# Altium PCB IO-testing-mezzanine.PcbDoc
Units mm, origin at the board's own origin, x right, y up, seen from the top; angles counter-clockwise.
Board outline 85 x 54 mm, 2 copper layers (Top Layer, Bottom Layer), stack 1.071 mm thick; 29 components, 88 nets, 312 pads, 154 vias.
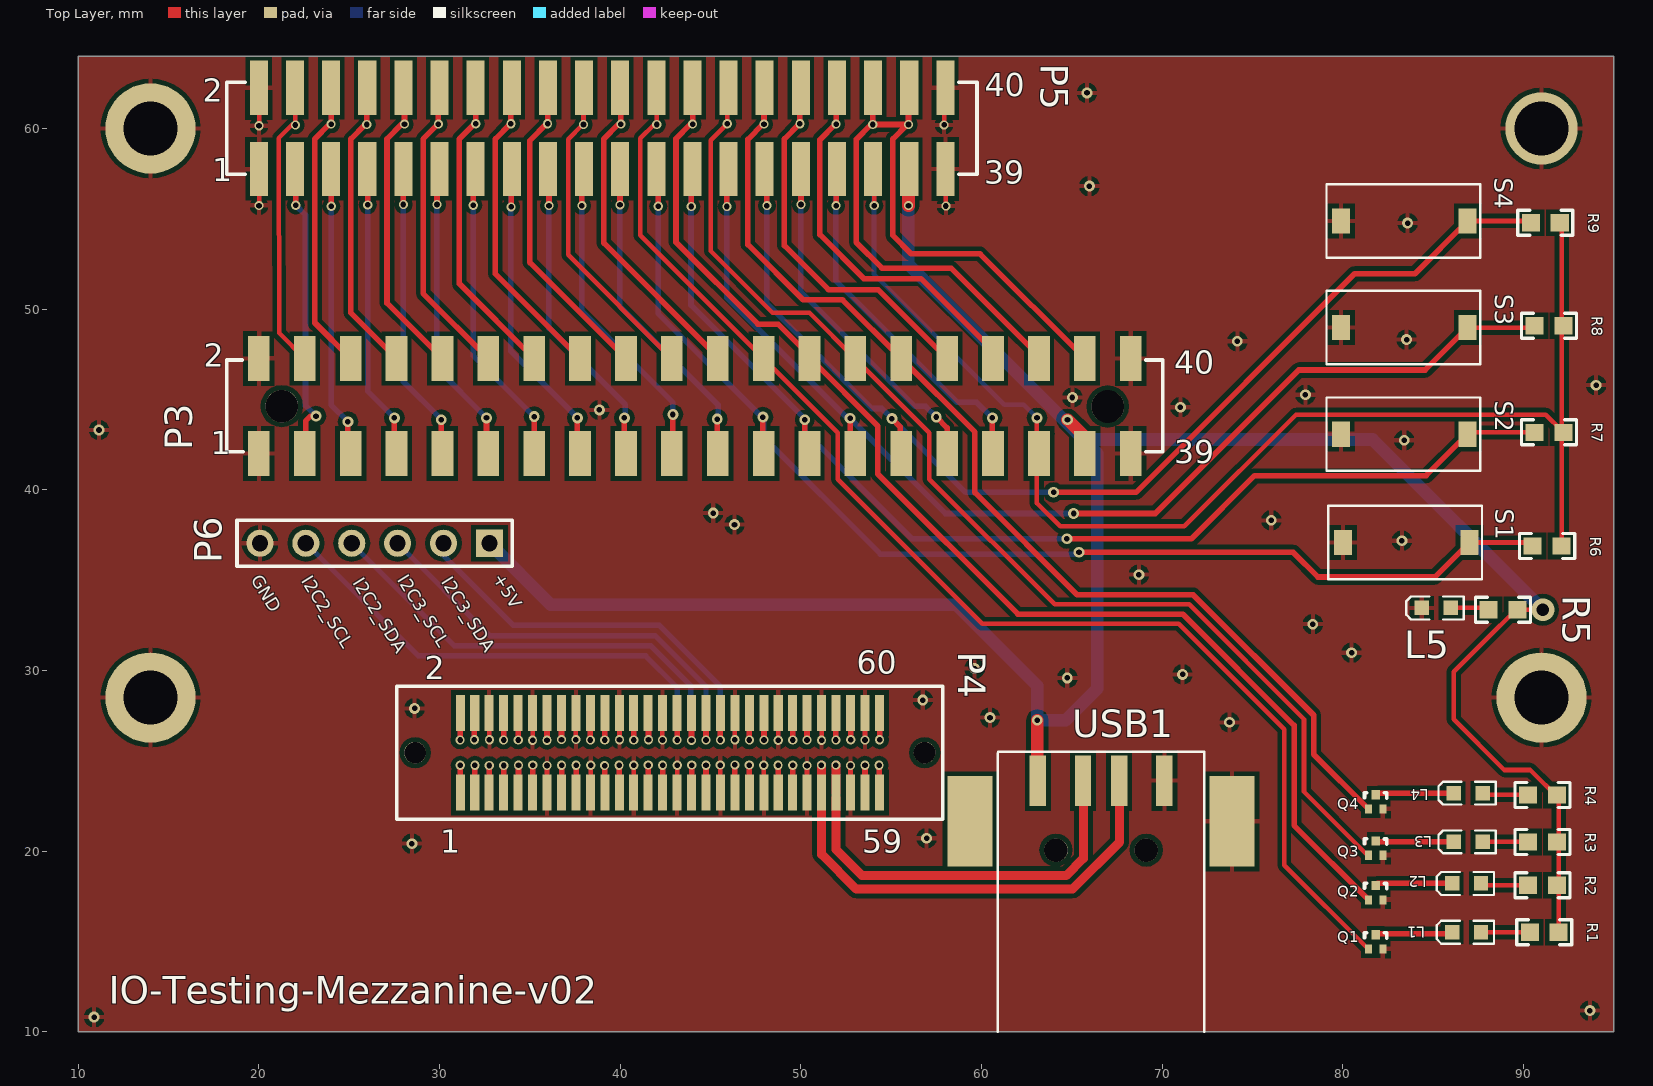
[diagram p0: Top Layer view]
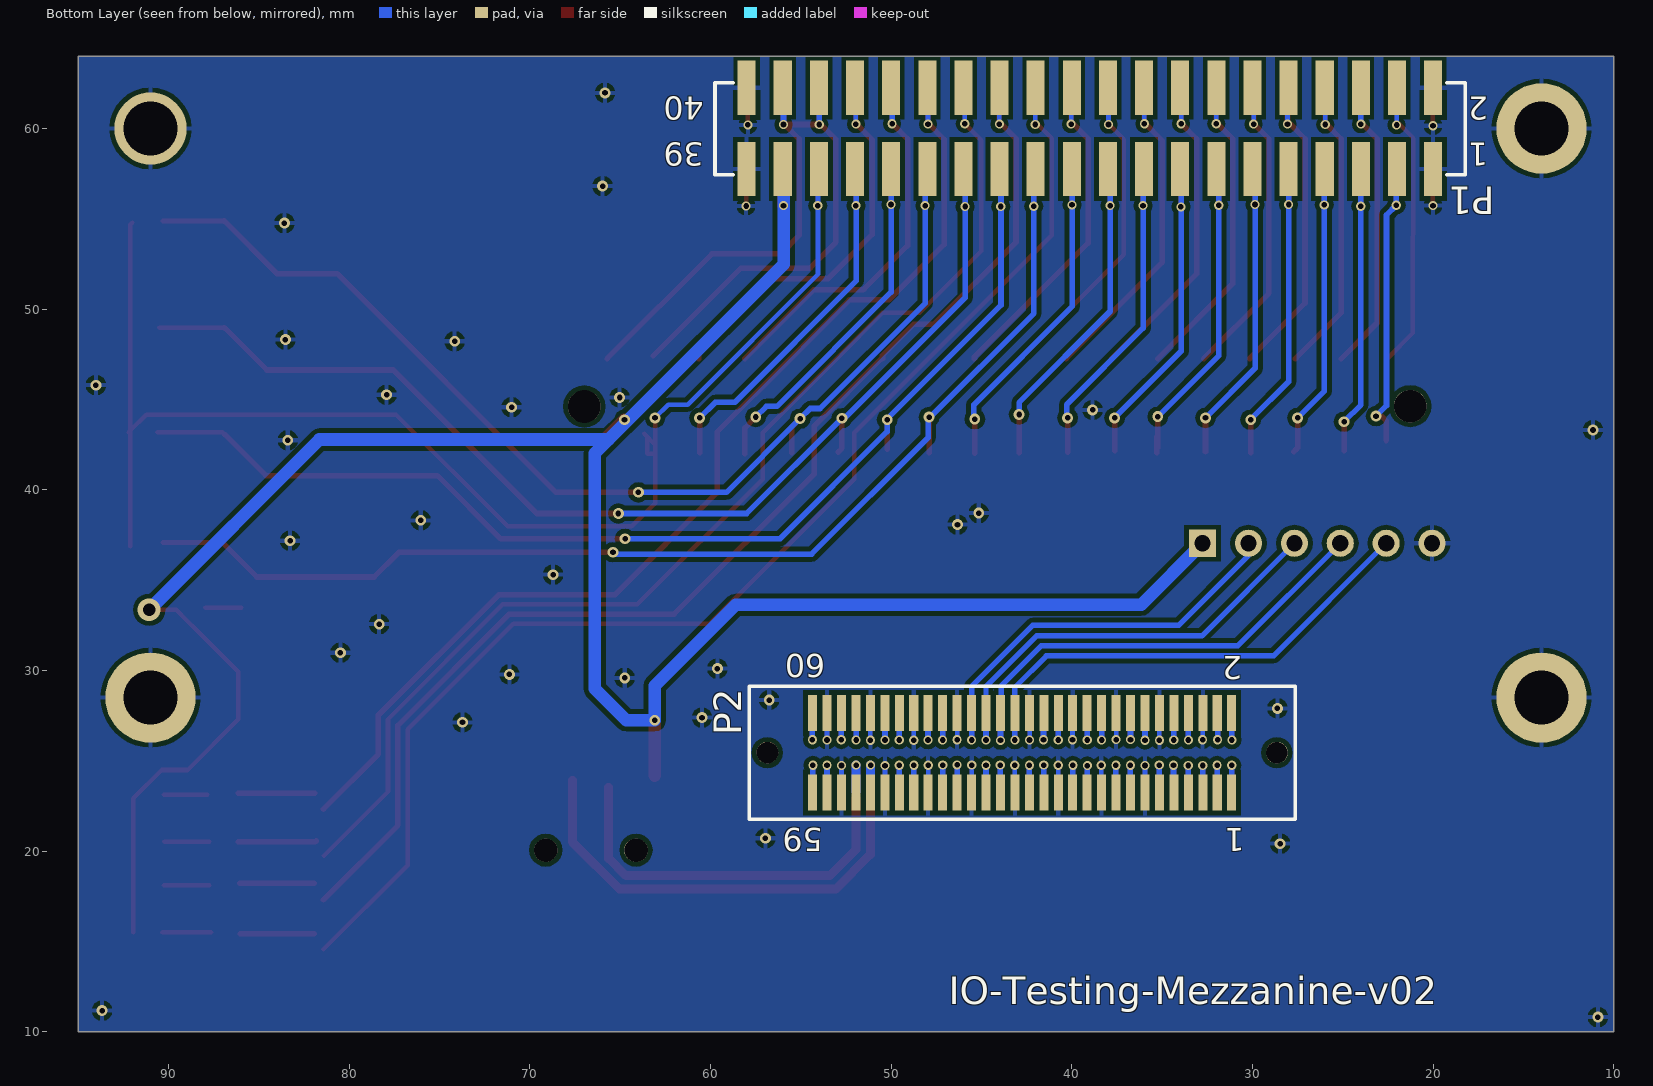
[diagram p1: Bottom Layer view, seen from below]
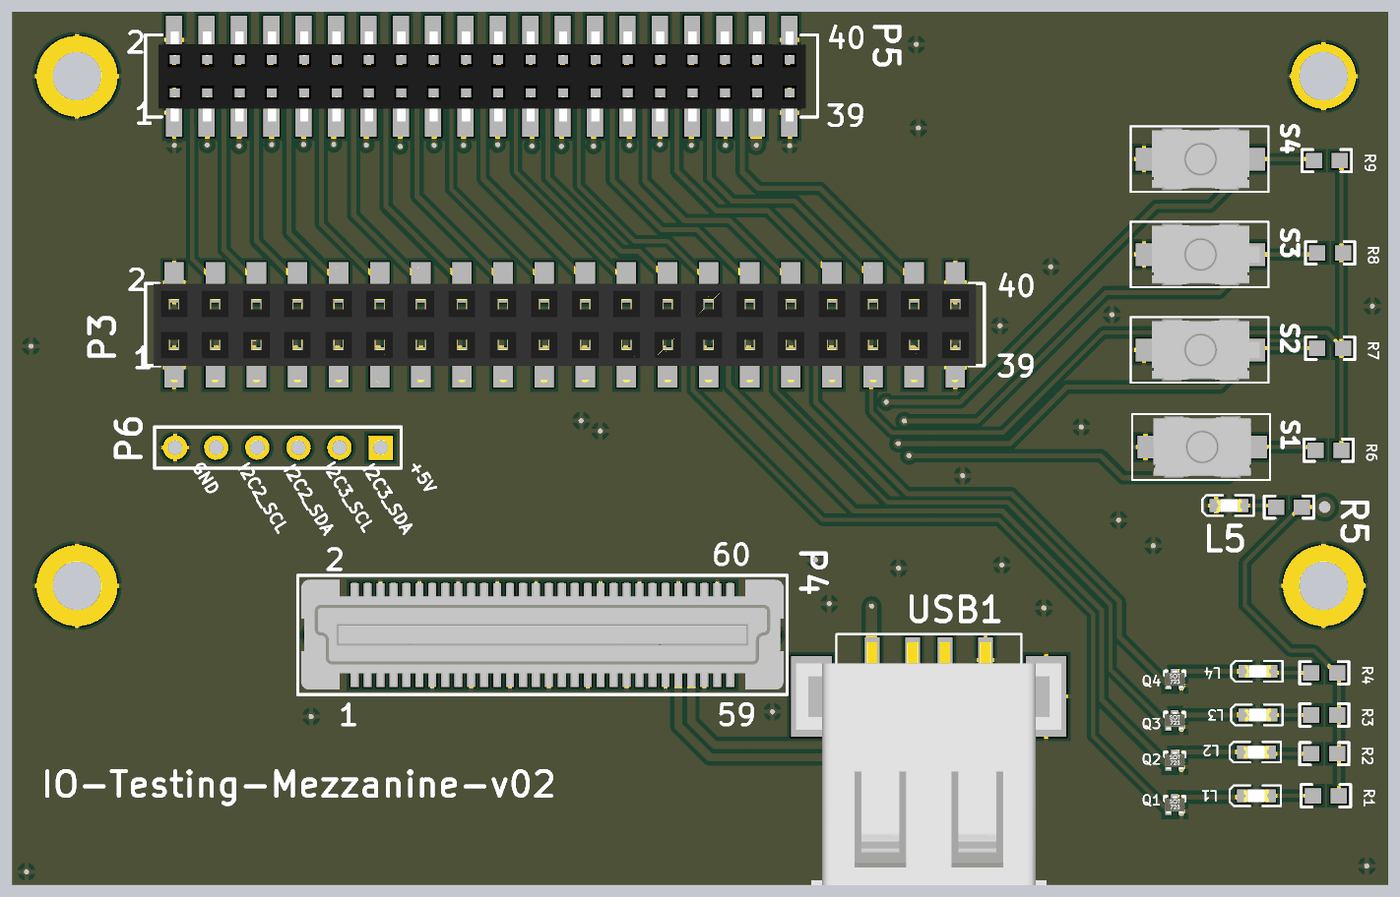
[diagram p2: 3D render of the assembled board from above, using the file's embedded part models]

## Layer stack, top to bottom
Top Solder: solder mask 0.0102, Solder Resist, Dk 3.5
Top Layer: signal copper 0.0356
Dielectric 1: dielectric 1, FR-4, Dk 4.8
Bottom Layer: signal copper 0.0356
Bottom Solder: solder mask 0.0102, Solder Resist, Dk 3.5

## Board outline
10,10 95,10 95,64 10,64

## Design rules (kind name [scope] priority, off if disabled: settings)
Clearance Clearance_1 [All] p1: gap=0.254
Clearance Clearance_USB [InNet('USB_D+') vs InNet('USB_D-')] p2: gap=0.3 except(0.254: Text-Text)
HoleSize [All] p1: absolutevalues=TRUE maxlimit=4 minlimit=0.31 maxpercent=80.000 minpercent=20.000
MinimumSolderMaskSliver [All] p1: minsoldermaskwidth=0.08
PolygonConnect [All] p1: connectstyle=Relief reliefconductorwidth=0.254 reliefentries=4 polygonreliefangle="90 Angle" airgapwidth=0.254
RoomDefinition "keepout _through_hole_HDMI" [InComponentClass('Bottom Side Components')] p1: confinementstyle=ConfineOut formatcopy=TRUE lockcomponents=FALSE outline 26,21 44,21 44,10 26,10
RoomDefinition "keepout _through_hole_USB" [InComponentClass('Bottom Side Components')] p2: confinementstyle=ConfineOut formatcopy=TRUE lockcomponents=FALSE outline 58,25.7 95,25.7 95,10 58,10
RoomDefinition "keepout _through_hole_PWR" [InComponentClass('Bottom Side Components')] p3: confinementstyle=ConfineOut formatcopy=TRUE lockcomponents=FALSE outline 77.5,64 88.7,64 88.7,50.2 77.5,50.2
RoutingVias [All] p1: holewidth=0.31 width=0.6 viastyle="Through Hole" minholewidth=0.31 minwidth=0.5 maxholewidth=0.711 maxwidth=1.27
SilkToSilkClearance [All] p1: silktosilkclearance=0.1
SilkToSolderMaskClearance [IsPad] p1: minsilkscreentomaskgap=0.1 clearancetoexposedcopper=TRUE
SolderMaskExpansion [All] p1: expansion=0.1
Width USB [InNet('USB_D+')   or InNet('USB_D-')] p1: maxlimit=0.5 minlimit=0.5 preferedwidth=0.5
Width [All] p2: maxlimit=0.7 minlimit=0.254 preferedwidth=0.31
26 further rules are at their usual default settings.

## Components (designator, comment, footprint, x,y, rotation, side; value= is the part's Value field where it differs from the comment)
L1 "" LED_0603 86.85,15.51 r180 top
L2 "" LED_0603 86.85,18.21 r180 top
L3 "" LED_0603 86.95,20.51 r180 top
L4 "" LED_0603 86.95,23.21 r180 top
L5 "" LED_0603 85.17,33.46 r180 top
P1 "low-speed_connector" low-speed_connector_SM 20,61 r0 bottom
P2 "High-speed_connector" high-speed_connector 42.75,25.45 r0 bottom
P3 "Female_Header_20x2_SM" Female_Header_20x2_SM 20,43.5 r0 top
P4 "High-speed_connector_top" high-speed_connector_top 42.75,25.45 r0 top
P5 "Female_Header_20x2_SM" low-speed_connector_SM_top 20,59 r0 top
P6 "Header 6" HDR1X6 32.76,37.04 r180 top (schematic designator P4)
Q1 "RUM002N05T2L" SOT-723 81.82,14.97 r0 top
Q2 "RUM002N05T2L" SOT-723 81.82,17.705 r0 top
Q3 "RUM002N05T2L" SOT-723 81.82,20.17 r0 top
Q4 "RUM002N05T2L" SOT-723 81.82,22.72 r0 top
R1 "Res1" 0603 91.15,15.51 r0 top
R2 "Res1" 0603 91.05,18.11 r0 top
R3 "Res1" 0603 91.05,20.502 r0 top
R4 "Res1" 0603 91.05,23.11 r0 top
R5 "Res1" 0603 88.87,33.36 r0 top
R6 "Res1" 0603 91.31,36.88 r0 top
R7 "Res1" 0603 91.41,43.18 r0 top
R8 "Res1" 0603 91.41,49.08 r0 top
R9 "Res1" 0603 91.21,54.78 r0 top
S1 "SW-PB" SW-PB 83.51,37.08 r0 top
S2 "SW-PB" SW-PB 83.41,43.08 r0 top
S3 "SW-PB" SW-PB 83.41,48.98 r0 top
S4 "SW-PB" SW-PB 83.41,54.88 r0 top
USB1 "USB" USB_a 66.62,23.9 r0 top

## Footprints (in the part's own frame and the unit in brackets; to place one, negate y for a bottom-side part, rotate by r counter-clockwise, add the part's x,y. Pads: shape width x height; smd on the part's side, far side on the other; paste and mask are expansions set on the pad)
0603 [mm]
  rect 1x0.95 smd: 1(-0.8,0) 2(0.8,0)
  silkscreen extent -1.52,-0.69 1.52,0.69, body extent -0.87,-0.47 0.87,0.47, height 0.85
Female_Header_20x2_SM [mm] "Surface mount Female header / 2.54mm pitch"
  rect 1.2x2.5 smd: 1(0,-1.5) 2(0,3.76) 3(2.54,-1.5) 4(2.54,3.76) 5(5.08,-1.5) 6(5.08,3.76) 7(7.62,-1.5) 8(7.62,3.76) 9(10.16,-1.5) 10(10.16,3.76) 11(12.7,-1.5) 12(12.7,3.76) 13(15.24,-1.5) 14(15.24,3.76) 15(17.78,-1.5) 16(17.78,3.76) 17(20.32,-1.5) 18(20.32,3.76) 19(22.86,-1.5) 20(22.86,3.76) 21(25.4,-1.5) 22(25.4,3.76) 23(27.94,-1.5) 24(27.94,3.76) 25(30.48,-1.5) 26(30.48,3.76) 27(33.02,-1.5) 28(33.02,3.76) 29(35.56,-1.5) 30(35.56,3.76) 31(38.1,-1.5) 32(38.1,3.76) 33(40.64,-1.5) 34(40.64,3.76) 35(43.18,-1.5) 36(43.18,3.76) 37(45.72,-1.5) 38(45.72,3.76) 39(48.26,-1.5) 40(48.26,3.76)
  round 1.8 hole 1.8 unplated: ""(1.27,1.13) ""(46.99,1.11)
  silkscreen extent -1.78,-1.4 50.04,3.68, body extent -1.27,-2.46 49.53,4.74, height 3.55
HDR1X6 [mm] "Connector; Header; 6 Position"
  rect 1.5x1.5 hole 0.9: 1(0,0)
  round 1.5 hole 0.9: 2(2.54,0) 3(5.08,0) 4(7.62,0) 5(10.16,0) 6(12.7,0)
  silkscreen extent -1.27,-1.27 13.97,1.27
high-speed_connector [mm] "high-speed connector"
  rect 0.5x2 smd: 1(-11.6,2.2) 2(-11.6,-2.2) 3(-10.8,2.2) 4(-10.8,-2.2) 5(-10,2.2) 6(-10,-2.2) 7(-9.2,2.2) 8(-9.2,-2.2) 9(-8.4,2.2) 10(-8.4,-2.2) 11(-7.6,2.2) 12(-7.6,-2.2) 13(-6.8,2.2) 14(-6.8,-2.2) 15(-6,2.2) 16(-6,-2.2) 17(-5.2,2.2) 18(-5.2,-2.2) 19(-4.4,2.2) 20(-4.4,-2.2) 21(-3.6,2.2) 22(-3.6,-2.2) 23(-2.8,2.2) 24(-2.8,-2.2) 25(-2,2.2) 26(-2,-2.2) 27(-1.2,2.2) 28(-1.2,-2.2) 29(-0.4,2.2) 30(-0.4,-2.2) 31(0.4,2.2) 32(0.4,-2.2) 33(1.2,2.2) 34(1.2,-2.2) 35(2,2.2) 36(2,-2.2) 37(2.8,2.2) 38(2.8,-2.2) 39(3.6,2.2) 40(3.6,-2.2) 41(4.4,2.2) 42(4.4,-2.2) 43(5.2,2.2) 44(5.2,-2.2) 45(6,2.2) 46(6,-2.2) 47(6.8,2.2) 48(6.8,-2.2) 49(7.6,2.2) 50(7.6,-2.2) 51(8.4,2.2) 52(8.4,-2.2) 53(9.2,2.2) 54(9.2,-2.2) 55(10,2.2) 56(10,-2.2) 57(10.8,2.2) 58(10.8,-2.2) 59(11.6,2.2) 60(11.6,-2.2)
  round 0.8 hole 0.8 unplated: ""(-14.1,0)
  round 1.2 hole 1.2 unplated: ""(14.1,0)
  silkscreen extent -15.11,-3.68 15.11,3.68, body extent -14.9,-3 14.9,3, height 7.65
high-speed_connector_top [mm] "high-speed connector"
  rect 0.5x2 smd: 1(-11.6,-2.2) 2(-11.6,2.2) 3(-10.8,-2.2) 4(-10.8,2.2) 5(-10,-2.2) 6(-10,2.2) 7(-9.2,-2.2) 8(-9.2,2.2) 9(-8.4,-2.2) 10(-8.4,2.2) 11(-7.6,-2.2) 12(-7.6,2.2) 13(-6.8,-2.2) 14(-6.8,2.2) 15(-6,-2.2) 16(-6,2.2) 17(-5.2,-2.2) 18(-5.2,2.2) 19(-4.4,-2.2) 20(-4.4,2.2) 21(-3.6,-2.2) 22(-3.6,2.2) 23(-2.8,-2.2) 24(-2.8,2.2) 25(-2,-2.2) 26(-2,2.2) 27(-1.2,-2.2) 28(-1.2,2.2) 29(-0.4,-2.2) 30(-0.4,2.2) 31(0.4,-2.2) 32(0.4,2.2) 33(1.2,-2.2) 34(1.2,2.2) 35(2,-2.2) 36(2,2.2) 37(2.8,-2.2) 38(2.8,2.2) 39(3.6,-2.2) 40(3.6,2.2) 41(4.4,-2.2) 42(4.4,2.2) 43(5.2,-2.2) 44(5.2,2.2) 45(6,-2.2) 46(6,2.2) 47(6.8,-2.2) 48(6.8,2.2) 49(7.6,-2.2) 50(7.6,2.2) 51(8.4,-2.2) 52(8.4,2.2) 53(9.2,-2.2) 54(9.2,2.2) 55(10,-2.2) 56(10,2.2) 57(10.8,-2.2) 58(10.8,2.2) 59(11.6,-2.2) 60(11.6,2.2)
  round 1.2 hole 1.2 unplated: ""(-14.1,0)
  round 0.8 hole 0.8 unplated: ""(14.1,0)
  silkscreen extent -15.11,-3.68 15.11,3.68, body extent -14.9,-3.38 14.9,3.42, height 7.65
LED_0603 [mm] "Chip LED, 2-Leads, Body 1.6x0.8mm, IPC Medium Density"
  rect 0.8x0.8 smd: 1(-0.8,0) 2(0.8,0)
  silkscreen extent -1.52,-0.64 1.65,0.64, body extent -0.8,-0.4 0.8,0.4, height 0.7
low-speed_connector_SM [mm] "Surface mount low-speed connector / 2mm pitch"
  rect 1x3 smd: 1(0,3.25) 2(0,-1.25) 3(2,3.25) 4(2,-1.25) 5(4,3.25) 6(4,-1.25) 7(6,3.25) 8(6,-1.25) 9(8,3.25) 10(8,-1.25) 11(10,3.25) 12(10,-1.25) 13(12,3.25) 14(12,-1.25) 15(14,3.25) 16(14,-1.25) 17(16,3.25) 18(16,-1.25) 19(18,3.25) 20(18,-1.25) 21(20,3.25) 22(20,-1.25) 23(22,3.25) 24(22,-1.25) 25(24,3.25) 26(24,-1.25) 27(26,3.25) 28(26,-1.25) 29(28,3.25) 30(28,-1.25) 31(30,3.25) 32(30,-1.25) 33(32,3.25) 34(32,-1.25) 35(34,3.25) 36(34,-1.25) 37(36,3.25) 38(36,-1.25) 39(38,3.25) 40(38,-1.25)
  silkscreen extent -1.78,-1.52 39.75,3.56, body extent -1.65,-2.29 39.62,4.3, height 6
low-speed_connector_SM_top [mm] "Surface mount low-speed connector / 2mm pitch"
  rect 1x3 smd: 1(0,-1.25) 2(0,3.25) 3(2,-1.25) 4(2,3.25) 5(4,-1.25) 6(4,3.25) 7(6,-1.25) 8(6,3.25) 9(8,-1.25) 10(8,3.25) 11(10,-1.25) 12(10,3.25) 13(12,-1.25) 14(12,3.25) 15(14,-1.25) 16(14,3.25) 17(16,-1.25) 18(16,3.25) 19(18,-1.25) 20(18,3.25) 21(20,-1.25) 22(20,3.25) 23(22,-1.25) 24(22,3.25) 25(24,-1.25) 26(24,3.25) 27(26,-1.25) 28(26,3.25) 29(28,-1.25) 30(28,3.25) 31(30,-1.25) 32(30,3.25) 33(32,-1.25) 34(32,3.25) 35(34,-1.25) 36(34,3.25) 37(36,-1.25) 38(36,3.25) 39(38,-1.25) 40(38,3.25)
  silkscreen extent -1.78,-1.52 39.75,3.56, body extent -0.97,-1.79 39.03,3.77, height 4.5
SOT-723 [mm]
  rect 0.37x0.5 smd mask+0.05: 1(-0.4,-0.4) 2(0.4,-0.4)
  rect 0.47x0.5 smd mask+0.05: 3(0,0.4)
  silkscreen extent -0.62,0.22 0.61,0.51, body extent -0.63,-0.54 0.63,0.51, height 0.45
SW-PB [mm] "Chip LED, 2-Leads, Body 1.6x0.8mm, IPC Medium Density"
  rect 1x1.4 smd: 1(-3.5,0) 2(3.5,0)
  silkscreen extent -4.32,-2.03 4.19,2.03, body extent -3.65,-1.92 3.65,1.92, height 2.35
USB_a [mm] "Mini USB"
  round 1.3 hole 1.3: 0(-2.5,-3.85) 0(2.5,-3.85)
  rect 0.9x2.8 smd: 1(-3.5,0) 2(-1,0) 3(1,0) 4(3.5,0)
  rect 2.5x5 smd: 6(7.25,-2.25) 7(-7.25,-2.25)
  silkscreen extent -5.71,-13.9 5.72,1.6, body extent -8.2,-13.91 8.2,1.09, height 7.8

## Part data
L1 L2 L3 L4 L5: library part LTST-C193TBKT-5A, "LED BLUE CLEAR 0603 SMD"
P6: "Header, 6-Pin"
Q1 Q2 Q3 Q4: "Nch 50V 200mA MOSFET"
R1 R2 R3 R4 R5 R6 R7 R8 R9: "Resistor"
S1 S2 S3 S4: "Switch"

## Free pads (board coordinates)
  round 5 hole 3: ""(14,28.5) ""(14,60) ""(91,28.5)
  round 4 hole 3: ""(91,60)

## Via types
v1: diameter 0.508, hole 0.31, Top Layer to Bottom Layer, tented both sides, 100 vias
v2: diameter 0.6, hole 0.31, Top Layer to Bottom Layer, tented both sides, 53 vias
v3: diameter 1.27, hole 0.711, Top Layer to Bottom Layer, tented both sides, 1 vias

## Nets (pads, with @x,y where several pads share a name; then routed paths per layer and width w, separated by ;. In a path a pad name is that pad's centre, name@x,y a point inside that pad or via, vN(x,y) a via of type N, cw(c..) or ccw(c..) an arc to the next point about the centre after c; other vN are vias at no path point)
+1V8: P1.35 P3.35 P5.35 R6.2 R7.2 R8.2 R9.2 | length 76.7
  Top Layer w0.254: v1(54.06,55.73) P5.35@54.06,57.69 ; P3.35@63.07,42.502 P3.35@63.669,43.101 ; v2(63.07,43.98) 63.07,39.26 64.359,37.971 71.221,37.971 77.411,44.161 91.229,44.161 R7.2@92.11,43.28 ; P3.35 63.5,42 P3.35@63.5,42.932 ; R9.2 92.11,54.68 R7.2@92.11,43.28 ; R6.2 R7.2@92.11,43.28 ; R7.2 R7.2@92.11,43.28
  Bottom Layer w0.254: P1.35@54.05,56.93 54.05,51.92 61.26,44.71 62.34,44.71 v2(63.07,43.98)
+5V: P1.37 P3.37 P5.37 P6.1 R1.2 R2.2 R3.2 R4.2 R5.2 USB1.1 | length 133
  Top Layer w0.254: R5.2 v3(91.07,33.36) 89.58,33.36 88.951,32.731 88.951,32.727 88.728,32.504 88.724,32.504 86.14,29.92 86.14,27.289 88.939,24.49 90.384,24.49 91.95,22.924 R1.2
  Top Layer w0.7: v1(55.96,55.73) P5.37@55.96,57.71 ; USB1.1@63.09,24.18 v2(63.09,27.24) ; v2(64.76,43.88) P3.37@65.72,42.92
  Bottom Layer w0.7: P6.1 36.17,33.63 58.61,33.63 63.09,29.15 v2(63.09,27.24) 64.66,27.24 66.404,28.984 66.404,42.026 65.65,42.78 ; P1.37@55.95,56.93 55.95,52.48 65.65,42.78 ; v3(91.07,33.36) 81.65,42.78 65.65,42.78
CLK0/CSI0_MCLK: P2.15 P4.15 | length 3
  Top Layer w0.31: P4.15@36.76,23.26 v1(36.76,24.75)
  Bottom Layer w0.31: P2.15@36.76,23.26 v1(36.76,24.75)
CLK1/CSI1_MCLK: P2.17 P4.17 | length 3
  Top Layer w0.31: P4.17@37.56,23.26 v1(37.56,24.75)
  Bottom Layer w0.31: P2.17@37.56,23.26 v1(37.56,24.75)
CSI0_C+: P2.2 P4.2 | length 3
  Top Layer w0.31: v1(31.14,26.15) P4.2@31.14,27.64
  Bottom Layer w0.31: v1(31.14,26.15) P2.2@31.14,27.64
CSI0_C-: P2.4 P4.4 | length 2.9
  Top Layer w0.31: v1(31.93,26.16) P4.4@31.93,27.63
  Bottom Layer w0.31: v1(31.93,26.16) P2.4@31.93,27.63
CSI0_D0+: P2.8 P4.8 | length 3
  Top Layer w0.31: v1(33.55,26.15) P4.8
  Bottom Layer w0.31: v1(33.55,26.15) P2.8
CSI0_D0-: P2.10 P4.10 | length 3
  Top Layer w0.31: v1(34.36,26.15) P4.10@34.36,27.64
  Bottom Layer w0.31: v1(34.36,26.15) P2.10@34.36,27.64
CSI0_D1+: P2.14 P4.14 | length 3
  Top Layer w0.31: v1(35.95,26.14) P4.14
  Bottom Layer w0.31: v1(35.95,26.14) P2.14
CSI0_D1-: P2.16 P4.16 | length 3
  Top Layer w0.31: v1(36.75,26.17) P4.16
  Bottom Layer w0.31: v1(36.75,26.17) P2.16
CSI0_D2+: P2.20 P4.20 | length 3
  Top Layer w0.31: v1(38.35,26.15) P4.20
  Bottom Layer w0.31: v1(38.35,26.15) P2.20
CSI0_D2-: P2.22 P4.22 | length 3
  Top Layer w0.31: v1(39.15,26.15) P4.22
  Bottom Layer w0.31: v1(39.15,26.15) P2.22
CSI0_D3+: P2.26 P4.26 | length 3
  Top Layer w0.31: v1(40.75,26.15) P4.26
  Bottom Layer w0.31: v1(40.75,26.15) P2.26
CSI0_D3-: P2.28 P4.28 | length 2.9
  Top Layer w0.31: v1(41.57,26.16) P4.28@41.57,27.63
  Bottom Layer w0.31: v1(41.57,26.16) P2.28@41.57,27.63
CSI1_C+: P2.54 P4.54 | length 3
  Top Layer w0.31: v1(51.94,26.15) P4.54@51.94,27.64
  Bottom Layer w0.31: v1(51.94,26.15) P2.54@51.94,27.64
CSI1_C-: P2.56 P4.56 | length 3
  Top Layer w0.31: v1(52.76,26.16) P4.56@52.76,27.64
  Bottom Layer w0.31: v1(52.76,26.16) P2.56@52.76,27.64
CSI1_D0+: P2.42 P4.42 | length 3
  Top Layer w0.31: v1(47.15,26.15) P4.42
  Bottom Layer w0.31: v1(47.15,26.15) P2.42
CSI1_D0-: P2.44 P4.44 | length 3
  Top Layer w0.31: v1(47.96,26.15) P4.44@47.96,27.64
  Bottom Layer w0.31: v1(47.96,26.15) P2.44@47.96,27.64
CSI1_D1+: P2.48 P4.48 | length 3
  Top Layer w0.31: v1(49.55,26.15) P4.48
  Bottom Layer w0.31: v1(49.55,26.15) P2.48
CSI1_D1-: P2.50 P4.50 | length 3
  Top Layer w0.31: v1(50.34,26.15) P4.50@50.34,27.64
  Bottom Layer w0.31: v1(50.34,26.15) P2.50@50.34,27.64
DSI_CLK+: P2.21 P4.21 | length 2.9
  Top Layer w0.31: P4.21@39.14,23.26 v1(39.14,24.73)
  Bottom Layer w0.31: P2.21@39.14,23.26 v1(39.14,24.73)
DSI_CLK-: P2.23 P4.23 | length 3
  Top Layer w0.31: P4.23@39.94,23.26 v1(39.94,24.75)
  Bottom Layer w0.31: P2.23@39.94,23.26 v1(39.94,24.75)
DSI_D0+: P2.27 P4.27 | length 3
  Top Layer w0.31: P4.27 v1(41.55,24.76)
  Bottom Layer w0.31: P2.27 v1(41.55,24.76)
DSI_D0-: P2.29 P4.29 | length 3
  Top Layer w0.31: P4.29 v1(42.35,24.75)
  Bottom Layer w0.31: P2.29 v1(42.35,24.75)
DSI_D1+: P2.33 P4.33 | length 3
  Top Layer w0.31: P4.33@43.96,23.26 v1(43.96,24.76)
  Bottom Layer w0.31: P2.33@43.96,23.26 v1(43.96,24.76)
DSI_D1-: P2.35 P4.35 | length 3
  Top Layer w0.31: P4.35 v1(44.75,24.75)
  Bottom Layer w0.31: P2.35 v1(44.75,24.75)
DSI_D2+: P2.39 P4.39 | length 2.8
  Top Layer w0.31: P4.39 v1(46.35,24.77)
  Bottom Layer w0.31: P2.39@46.35,23.481 v1(46.35,24.77)
DSI_D2-: P2.41 P4.41 | length 2.7
  Top Layer w0.31: P4.41@47.14,23.26 v1(47.14,24.76)
  Bottom Layer w0.31: P2.41@47.14,23.561 v1(47.14,24.76)
DSI_D3+: P2.45 P4.45 | length 3
  Top Layer w0.31: P4.45@48.74,23.26 v1(48.74,24.75)
  Bottom Layer w0.31: P2.45@48.74,23.26 v1(48.74,24.75)
DSI_D3-: P2.47 P4.47 | length 3
  Top Layer w0.31: P4.47 v1(49.55,24.75)
  Bottom Layer w0.31: P2.47 v1(49.55,24.75)
GND: L5.2 P1.1 P1.2 P1.39 P1.40 P2.6 P2.12 P2.13 P2.18 P2.19 P2.24 P2.25 P2.30 P2.31 P2.37 P2.40 P2.43 P2.46 P2.49 P2.52 P2.55 P2.58 P3.1 P3.2 P3.39 P3.40 P4.6 P4.12 P4.13 P4.18 P4.19 P4.24 P4.25 P4.30 P4.31 P4.37 P4.40 P4.43 P4.46 P4.49 P4.52 P4.55 P4.58 P5.1 P5.2 P5.39 P5.40 P6.6 pad. Q1.2 Q2.2 Q3.2 Q4.2 S1.1 S2.1 S3.1 S4.1 USB1.4 USB1.6 | length 58.3
  Top Layer w0.254: v1(20.01,55.73) P5.1@20.01,57.74 ; v1(20.01,60.15) P5.2@20.01,62.24 ; v1(32.76,26.16) P4.6@32.76,27.64 ; v1(35.15,26.14) P4.12 ; P4.13 v1(35.95,24.74) ; v1(37.55,26.17) P4.18 ; P4.19@38.37,23.27 v1(38.37,24.75) ; v1(39.96,26.16) P4.24@39.96,27.64 ; P4.25 v1(40.75,24.75) ; v1(42.34,26.15) P4.30@42.34,27.64 ; P4.31@43.16,23.26 v1(43.16,24.75) ; P4.37@45.54,23.26 v1(45.54,24.76) ; v1(46.35,26.16) P4.40 ; P4.43 v1(47.95,24.75) ; v1(48.75,26.14) P4.46 ; P4.49@50.34,23.26 v1(50.34,24.73) ; v1(51.15,26.14) P4.52 ; P4.55 v1(52.75,24.74) ; v1(53.55,26.15) P4.58 ; v1(57.93,60.2) P5.40@57.93,62.18 ; v1(58.03,55.71) P5.39@58.03,57.72
  Bottom Layer w0.254: v1(32.76,26.16) P2.6@32.76,27.64 ; v1(35.15,26.14) P2.12 ; P2.13 v1(35.95,24.74) ; v1(37.55,26.17) P2.18 ; P2.19@38.37,23.27 v1(38.37,24.75) ; v1(39.96,26.16) P2.24@39.96,27.071 ; P2.25 v1(40.75,24.75) ; v1(42.34,26.15) P2.30@42.34,27.64 ; P2.31@43.16,23.26 v1(43.16,24.75) ; P2.37@45.54,23.26 v1(45.54,24.76) ; v1(46.35,26.16) P2.40 ; P2.43 v1(47.95,24.75) ; v1(48.75,26.14) P2.46 ; P2.49@50.34,23.26 v1(50.34,24.73) ; v1(51.15,26.14) P2.52 ; P2.55 v1(52.75,24.74) ; v1(53.55,26.15) P2.58
  other v2: 10.88,10.81 93.675,11.17 28.47,20.41 56.96,20.71 73.73,27.129 60.47,27.39 28.62,27.9 56.75,28.36 64.749,29.59 71.13,29.78 59.621,30.1 80.49,30.98 78.34,32.56 68.71,35.3 83.27,37.18 46.33,38.07 76.04,38.31 45.15,38.71 83.4,42.74 11.15,43.31 38.85,44.42 71.01,44.57 65.03,45.11 77.93,45.26 94.02,45.79 74.16,48.22 83.53,48.31 83.59,54.76 65.97,56.81 65.84,61.97
GPIO-A: P1.23 P3.23 P5.23 R6.1 S1.2 | length 66.8
  Top Layer w0.254: S1.2 R6.1@90.31,37.08
  Top Layer w0.31: v1(42.11,55.69) P5.23@42.11,57.64 ; P3.23@47.9,42.04 v2(47.9,44.02) ; v2(65.4,36.54) 77.25,36.54 78.617,35.173 85.103,35.173 S1.2
  Bottom Layer w0.31: P1.23@42.1,56.89 42.1,49.76 47.95,43.91 47.95,42.89 54.4,36.44 65.36,36.44 65.4,36.48 v2(65.4,36.54)
GPIO-B: P1.24 P3.24 P5.24 Q1.1 | length 72.9
  Top Layer w0.254: v1@41.88,60.22 41.119,59.459 41.119,54.081 P3.24 52.039,43.161 52.039,40.592 60.049,32.582 70.92,32.582 76.766,26.736 76.766,19.224 Q1.1 ; v1(42.02,60.22) P5.24@42.02,62.23
  Bottom Layer w0.254: v1(42.02,60.22) P1.24@42.02,62.1
GPIO-C: P1.25 P3.25 P5.25 R7.1 S2.2 | length 65.1
  Top Layer w0.254: S2.2@87.01,43.18 R7.1
  Top Layer w0.31: v1(43.93,55.68) P5.25@43.93,57.68 ; P3.25@50.22,42.26 v2(50.22,43.88) ; v2(64.73,37.29) 71.62,37.29 75.11,40.78 84.61,40.78 S2.2
  Bottom Layer w0.31: P1.25@43.92,56.88 43.92,50.22 50.26,43.88 v2(50.22,43.88) 50.22,43.22 56.15,37.29 v2(64.73,37.29)
GPIO-D: P1.26 P3.26 P5.26 Q2.1 | length 69
  Top Layer w0.31: v1@43.9,60.24 43.091,59.431 43.091,53.701 47.622,49.17 48.74,49.17 50.48,47.43 P3.26 50.531,47.26 54.26,43.531 54.26,40.872 62.014,33.118 71.142,33.118 77.302,26.958 77.302,21.423 Q2.1 ; v1(44.01,60.24) P5.26@44.01,62.24
  Bottom Layer w0.254: v1(44.01,60.24) P1.26@44.01,62.09
GPIO-E: P1.27 P3.27 P5.27 R8.1 S3.2 | length 65.3
  Top Layer w0.254: S3.2 R8.1@90.51,48.98
  Top Layer w0.31: v1(45.91,55.68) P5.27@45.91,57.66 ; v2(52.73,43.96) 52.73,42.29 P3.27@52.93,42.09 ; v2(65.1,38.69) 69.62,38.69 77.56,46.63 84.56,46.63 S3.2
  Bottom Layer w0.31: P1.27@45.9,56.88 45.9,50.64 v2@52.655,43.885 ; v1(45.91,55.68) P1.27@45.91,57.028 ; v2(52.73,43.96) 58,38.69 v2(65.1,38.69)
GPIO-F: P1.28 P3.28 P5.28 Q3.1 | length 65.2
  Top Layer w0.254: P5.28@45.93,62.18 v1(45.93,60.26) 45.01,59.34 45.01,53.22 48.43,49.8 50.48,49.8 P3.28 57.119,43.161 57.119,40.592 64.057,33.654 71.495,33.654 77.854,27.295 77.854,23.289 Q3.1@81.396,19.747
  Bottom Layer w0.254: v1(45.93,60.26) P1.28@45.93,62.01
GPIO-G: P1.29 P3.29 P5.29 R9.1 S4.2 | length 64.8
  Top Layer w0.254: S4.2 R9.1@90.31,54.88
  Top Layer w0.31: v1(48.12,55.73) P5.29@48.12,57.63 ; v2(55.04,43.94) 55.5,43.48 P3.29@55.5,42.06 ; v2(63.99,39.86) 68.548,39.86 80.648,51.96 83.99,51.96 S4.2
  Bottom Layer w0.31: P1.29@48.11,56.93 48.11,50.33 53.94,44.5 54.48,44.5 v2(55.04,43.94) 59.12,39.86 v2(63.99,39.86) ; v1(48.12,55.73) P1.29@48.12,57.238
GPIO-H: P1.30 P3.30 P5.30 Q4.1 | length 61.4
  Top Layer w0.31: P5.30@47.96,62.21 v1(47.96,60.24) 47.912,60.24 47.07,59.398 47.07,53.57 50.12,50.52 51.292,50.52 51.296,50.516 52.304,50.516 P3.30 59.631,43.189 59.631,39.849 65.29,34.19 71.717,34.19 78.39,27.517 78.39,25.35 Q4.1
  Bottom Layer w0.254: v1(47.96,60.24) P1.30@47.96,62.04
GPIO-I: P1.31 P3.31 P5.31 | length 20.6
  Top Layer w0.31: v1(50.01,55.79) P5.31@50.01,57.74 ; v2(57.5,44.03) 58.1,43.43 P3.31
  Bottom Layer w0.31: P1.31@50,56.99 50,50.94 56.32,44.62 56.91,44.62 v2(57.5,44.03)
GPIO-J: P1.32 P3.32 P5.32 | length 22.4
  Top Layer w0.31: v1@49.932,60.26 49.091,59.419 49.091,53.519 51.53,51.08 54.28,51.08 P3.32 ; v1(49.95,60.26) P5.32@49.95,62.2
  Bottom Layer w0.31: v1(49.95,60.26) P1.32@49.95,62.03
GPIO-K: P1.33 P3.33 P5.33 | length 21.1
  Top Layer w0.31: v1(51.95,55.73) P5.33@51.95,57.7 ; P3.33@60.6,42.04 v2(60.6,43.98)
  Bottom Layer w0.31: P1.33@51.94,56.93 51.94,51.56 58.66,44.84 59.74,44.84 v2(60.6,43.98)
GPIO-L: P1.34 P3.34 P5.34 | length 22.9
  Top Layer w0.31: v1@51.912,60.24 51.05,59.378 51.05,54.122 53.482,51.69 56.65,51.69 60.64,47.7 P3.34 ; v1(51.95,60.24) P5.34@51.95,62.2
  Bottom Layer w0.254: v1(51.95,60.24) P1.34@51.95,62.03
HSIC_DATA: P2.59 P4.59 | length 3
  Top Layer w0.31: P4.59@54.33,23.27 v1(54.33,24.75)
  Bottom Layer w0.31: P2.59@54.33,23.27 v1(54.33,24.75)
HSIC_STR: P2.57 P4.57 | length 3
  Top Layer w0.31: P4.57 v1(53.55,24.75)
  Bottom Layer w0.31: P2.57 v1(53.55,24.75)
I2C0_SCL: P1.15 P3.15 P5.15 | length 18.3
  Top Layer w0.31: v1(33.96,55.66) P5.15@33.96,57.71 ; P3.15@37.63,42.15 v2(37.63,43.98)
  Bottom Layer w0.31: P1.15@33.95,56.86 33.95,47.67 v2@37.68,43.94
I2C0_SDA: P1.17 P3.17 P5.17 | length 18.6
  Top Layer w0.31: v1(36.06,55.73) P5.17@36.06,57.69 ; P3.17@40.23,42.09 v2(40.23,43.98)
  Bottom Layer w0.31: P1.17@36.05,56.93 36.05,48.95 40.28,44.72 v2@40.28,43.98
I2C1_SCL: P1.19 P3.19 P5.19 | length 18.9
  Top Layer w0.31: v1(37.88,55.73) P5.19@37.88,57.63 ; P3.19@42.92,42.06 v2(42.92,44.17)
  Bottom Layer w0.31: P1.19@37.87,56.93 37.87,49.88 42.92,44.83 v2(42.92,44.17)
I2C1_SDA: P1.21 P3.21 P5.21 | length 19.2
  Top Layer w0.31: v1(39.99,55.77) P5.21@39.99,57.74 ; P3.21@45.37,42.03 v2(45.37,43.91)
  Bottom Layer w0.31: P1.21@39.98,56.97 39.98,50.15 45.42,44.71 v2@45.42,43.91
I2C2_SCL: P2.32 P4.32 P6.5 | length 28.3
  Top Layer w0.3: v1(43.15,26.15) P4.32
  Bottom Layer w0.3: P6.5 28.83,30.81 41.41,30.81 43.15,29.07 P2.32 v1(43.15,26.15)
I2C2_SDA: P2.34 P4.34 P6.4 | length 26.6
  Top Layer w0.31: v1(43.95,26.13) P4.34
  Bottom Layer w0.3: P6.4 30.816,31.364 41.698,31.364 43.904,29.158 43.904,27.65 P2.34
  Bottom Layer w0.31: v1(43.95,26.13) P2.34
I2C3_SCL: P2.36 P4.36 P6.3 | length 24.8
  Top Layer w0.31: v1(44.75,26.15) P4.36
  Bottom Layer w0.3: P6.3 32.802,31.918 41.944,31.918 44.75,29.112 P2.36
  Bottom Layer w0.31: v1(44.75,26.15) P2.36
I2C3_SDA: P2.38 P4.38 P6.2 | length 23.5
  Top Layer w0.31: v1(45.55,26.15) P4.38
  Bottom Layer w0.3: P6.2 30.22,36.37 34.08,32.51 42.152,32.51 45.55,29.112 P2.38
  Bottom Layer w0.31: v1(45.55,26.15) P2.38
NetL1_1: L1.1 R1.1 | length 2.7
  Top Layer w0.254: L1.1 R1.1
NetL1_2: L1.2 Q1.3 | length 4.1
  Top Layer w0.31: Q1.3@81.95,15.43 L1.2@86.04,15.43
NetL2_1: L2.1 R2.1 | length 2.5
  Top Layer w0.254: L2.1@87.75,18.11 R2.1
NetL2_2: L2.2 Q2.3 | length 4.1
  Top Layer w0.31: Q2.3@81.925,18.21 L2.2
NetL3_1: L3.1 R3.1 | length 2.5
  Top Layer w0.254: L3.1 R3.1@90.242,20.51
NetL3_2: L3.2 Q3.3 | length 4.4
  Top Layer w0.31: Q3.3 81.88,20.51 L3.2
NetL4_1: L4.1 R4.1 | length 2.4
  Top Layer w0.254: L4.1@87.85,23.11 R4.1
NetL4_2: L4.2 Q4.3 | length 4.2
  Top Layer w0.31: Q4.3@81.91,23.21 L4.2
NetL5_1: L5.1 R5.1 | length 2
  Top Layer w0.254: L5.1 R5.1@87.97,33.46
PCM_CLK: P1.18 P3.18 P5.18 | length 19.4
  Top Layer w0.31: v1@35.932,60.26 35,59.328 35,52.58 P3.18 ; v1(35.98,60.26) P5.18@35.98,62.23
  Bottom Layer w0.254: v1(35.98,60.26) P1.18@35.98,62.06
PCM_D0: P1.20 P3.20 P5.20 | length 19.5
  Top Layer w0.254: v1@37.931,60.22 37.119,59.408 37.119,53.001 P3.20 ; v1(37.97,60.22) P5.20@37.97,62.22
  Bottom Layer w0.254: v1(37.97,60.22) P1.20@37.97,62.05
PCM_DI: P1.22 P3.22 P5.22 | length 19.8
  Top Layer w0.31: v1@39.912,60.24 39.091,59.419 39.091,53.66 39.1,53.66 45.4,47.36 P3.22 ; v1(40.04,60.24) P5.22@40.04,62.21
  Bottom Layer w0.254: v1(40.04,60.24) P1.22@40.04,62.12
PCM_FS: P1.16 P3.16 P5.16 | length 19
  Top Layer w0.31: P5.16@33.95,62.2 v1(33.95,60.26) 33.932,60.26 33.091,59.419 33.091,51.949 P3.16
  Bottom Layer w0.254: v1(33.95,60.26) P1.16@33.95,62.03
PWR_BTN_N: P1.4 P3.4 P5.4 | length 18
  Top Layer w0.254: P5.4@22.02,62.23 v1(22.02,60.19) 21.83,60.19 21.11,59.47 21.119,48.681 P3.4
  Bottom Layer w0.254: v1(22.02,60.19) P1.4@22.02,62.1
RESERVED: P2.60 P4.60 | length 3
  Top Layer w0.31: v1(54.36,26.16) P4.60@54.36,27.64
  Bottom Layer w0.31: v1(54.36,26.16) P2.60@54.36,27.64
RST_BTN_N: P1.6 P3.6 P5.6 | length 18.1
  Top Layer w0.31: P5.6 v1(24,60.24) 23.912,60.24 23.091,59.419 23.091,49.249 P3.6
  Bottom Layer w0.31: v1(24,60.24) P1.6@24,62.08
SD_CMD/SPI1_DIN: P2.11 P4.11 | length 3
  Top Layer w0.31: P4.11@35.16,23.26 v1(35.16,24.76)
  Bottom Layer w0.31: P2.11@35.16,23.26 v1(35.16,24.76)
SD_DAT0/SPI1_DOUT: P2.1 P4.1 | length 3
  Top Layer w0.31: P4.1 v1(31.15,24.75)
  Bottom Layer w0.31: P2.1 v1(31.15,24.75)
SD_DAT1: P2.3 P4.3 | length 3
  Top Layer w0.31: P4.3@31.96,23.26 v1(31.96,24.75)
  Bottom Layer w0.31: P2.3@31.96,23.26 v1(31.96,24.75)
SD_DAT2: P2.5 P4.5 | length 3
  Top Layer w0.31: P4.5 v1(32.75,24.74)
  Bottom Layer w0.31: P2.5 v1(32.75,24.74)
SD_DAT3/SPI1_CS: P2.7 P4.7 | length 3
  Top Layer w0.31: P4.7@33.56,23.26 v1(33.56,24.74)
  Bottom Layer w0.31: P2.7@33.56,23.26 v1(33.56,24.74)
SD_SCLK/SPI1_SCLK: P2.9 P4.9 | length 3
  Top Layer w0.31: P4.9@34.37,23.27 v1(34.37,24.75)
  Bottom Layer w0.31: P2.9@34.37,23.27 v1(34.37,24.75)
SPI0_CS: P1.12 P3.12 P5.12 | length 18.5
  Top Layer w0.31: v1@29.912,60.24 29.091,59.419 29.091,50.869 P3.12 ; v1(29.94,60.24) P5.12@29.94,62.19
  Bottom Layer w0.254: v1(29.94,60.24) P1.12@29.94,62.02
SPI0_DIN: P1.10 P3.10 P5.10 | length 18.6
  Top Layer w0.31: P5.10@28.06,62.19 v1(28.06,60.24) 27.912,60.24 27.091,59.419 27.091,50.329 P3.10
  Bottom Layer w0.254: v1(28.06,60.24) P1.10@28.06,62.14
SPI0_DOUT: P1.14 P3.14 P5.14 | length 18.9
  Top Layer w0.31: v1@31.932,60.26 31.091,59.419 31.091,51.409 P3.14 ; v1(32.01,60.26) P5.14@32.01,62.24
  Bottom Layer w0.254: v1(32.01,60.26) P1.14@32.01,62.09
SPI0_SCL: P1.8 P3.8 P5.8 | length 18.2
  Top Layer w0.31: P5.8@25.97,62.22 v1(25.97,60.22) 25.892,60.22 25.091,59.419 25.091,49.789 P3.8
  Bottom Layer w0.254: v1(25.97,60.22) P1.8@25.97,62.05
SYS_DCIN: P1.36 P1.38 P3.36 P3.38 P5.36 P5.38 | length 49.1
  Top Layer w0.31: v1@53.892,60.22 53.07,59.398 53.07,53.69 54.49,52.27 58.32,52.27 P3.36@63.18,47.41 ; P5.36@53.98,62.23 v1(53.98,60.22) 55.892,60.22 55.091,59.419 55.091,54.081 56.112,53.06 59.92,53.06 P3.38 ; v1(55.96,60.22) P5.38@55.96,62.21
  Bottom Layer w0.31: v1(53.98,60.22) P1.36@53.98,62.06 ; v1(55.96,60.22) P1.38@55.96,62.04
UART0_CTS: P1.3 P3.3 P5.3 | length 17.8
  Top Layer w0.31: v1(22.04,55.75) P5.3@22.04,57.71 ; P3.3@22.59,42.73 22.59,43.81 22.86,44.08 v2(23.16,44.08)
  Bottom Layer w0.31: P1.3@22.04,57.71 v1(22.04,55.75) 22.579,55.211 22.579,44.661 v2(23.16,44.08)
UART0_RTS: P1.9 P3.9 P5.9 | length 17.8
  Top Layer w0.31: v1(28,55.79) P5.9 ; P3.9@30.1,42.06 v2(30.1,43.88) v2@30.11,43.87
  Bottom Layer w0.31: P1.9@27.99,56.99 27.99,45.99 v2(30.1,43.88)
UART0_RXD: P1.7 P3.7 P5.7 | length 17.5
  Top Layer w0.31: v1(26.03,55.77) P5.7@26.03,57.72 ; P3.7@27.5,42.32 v2(27.5,43.98) ; P3.7@27.55,42.27 P3.7@27.72,42.1
  Bottom Layer w0.31: P1.7@26.02,56.97 26.02,45.46 v2(27.5,43.98)
UART0_TXD: P1.5 P3.5 P5.5 | length 17.3
  Top Layer w0.31: v1(24.01,55.69) P5.5@24.01,57.74 ; P3.5@24.93,42.15 v2(24.93,43.77) v2@25.03,43.67
  Bottom Layer w0.31: P1.5@24,56.89 24,44.7 v2(24.93,43.77)
UART1_RXD: P1.13 P3.13 P5.13 | length 18.8
  Top Layer w0.31: v1(31.87,55.75) P5.13@31.87,57.62 ; P3.13@35.24,42.32 v2(35.24,44.05) ; P3.13@35.29,42.05 P3.13@35.29,42.92
  Bottom Layer w0.31: P1.13@31.86,56.95 31.86,47.43 v2(35.24,44.05)
UART1_TXD: P1.11 P3.11 P5.11 | length 17.9
  Top Layer w0.31: v1(29.86,55.79) P5.11@29.86,57.61 ; P3.11@32.6,42.1 v2(32.6,43.98)
  Bottom Layer w0.31: P1.11@29.85,56.99 29.85,46.73 v2(32.6,43.98) v2@32.6,44.08
USB_D+: P2.51 P4.51 USB1.3 | length 28
  Top Layer w0.5: P4.51@51.14,23.26 v1(51.14,24.76) ; P4.51@51.15,23.06 51.15,19.821 53.079,17.892 65.037,17.892 67.64,20.495 USB1.3@67.64,23.9
  Bottom Layer w0.5: P2.51@51.14,23.26 v1(51.14,24.76)
USB_D-: P2.53 P4.53 USB1.2 | length 24.5
  Top Layer w0.5: P4.53@51.94,23.26 v1(51.94,24.76) ; P4.53@51.95,22.95 51.95,20.087 53.391,18.646 64.69,18.646 65.64,19.596 USB1.2@65.64,23.512
  Bottom Layer w0.5: P2.53@51.94,23.26 v1(51.94,24.76)
pads on no net: P2. P3. P4. USB1.0 USB1.7

## Polygon pours and split planes (outlines as drawn)
GND on Bottom Layer "Bottom_GND" (solid, pour order 0): 10,64 10,10 95,10 95,64 93.6,64 10,64
GND on Top Layer "Top_GND" (solid, pour order 2): 10,64 10,10 95,10 95,64 93.6,64 10,64

## Silkscreen, mask and mechanical layers (free items; w line width, h text height)
Top Overlay:
  text "+5V" at 32.91,35.11 h0.7 r301.79
  text "I2C3_SCL" at 27.63,35.02 h0.7 r301.79
  text "GND" at 19.51,35.01 h0.7 r301.79
  text "I2C2_SCL" at 22.33,34.96 h0.7 r301.79
  text "I2C3_SDA" at 30.056,34.91 h0.7 r301.79
  text "I2C2_SDA" at 25.17,34.86 h0.7 r301.79
  text "IO-Testing-Mezzanine-v02" at 11.684,11.557 h1.52
Bottom Overlay:
  text "IO-Testing-Mezzanine-v02" at 46.8,11.53 h1.52
Mechanical 1:
  the board outline again, w0.5

## Text inside footprints (layer, text, board x,y; h text height)
P1: Bottom Overlay "1" at 16.952,59.222 h1.27 r180; Bottom Overlay "39" at 60.386,59.222 h1.27 r180; Bottom Overlay "40" at 60.386,61.762 h1.27 r180; Bottom Overlay "2" at 16.952,61.762 h1.27 r180
P2: Bottom Overlay "2" at 30.558,30.784 h1.27 r180; Bottom Overlay "60" at 53.661,30.9 h1.27 r180; Bottom Overlay "59" at 53.799,21.259 h1.27 r180; Bottom Overlay "1" at 30.431,21.259 h1.27 r180
P3: Top Overlay "1" at 17.333,41.976 h1.27; Top Overlay "39" at 70.673,41.468 h1.27; Top Overlay "40" at 70.673,46.421 h1.27; Top Overlay "2" at 16.952,46.802 h1.27
P4: Top Overlay "2" at 29.19,29.5 h1.27; Top Overlay "60" at 53.082,29.813 h1.27; Top Overlay "59" at 53.409,19.901 h1.27; Top Overlay "1" at 30.041,19.901 h1.27
P5: Top Overlay "1" at 17.42,57.09 h1.27; Top Overlay "39" at 60.15,56.95 h1.27; Top Overlay "40" at 60.18,61.77 h1.27; Top Overlay "2" at 16.89,61.49 h1.27